# Altium PCB SBTech_IcarusBoard_1V0.PcbDoc (part 2 of 2)
Units mm, origin at the board's own origin, x right, y up, seen from the top; angles counter-clockwise.
Board outline 76.5 x 109.5 mm, 4 copper layers (Component Side, Ground Plane, Power Plane, Solder Side), stack 0.844 mm thick; 136 components, 92 nets, 463 pads, 332 vias.
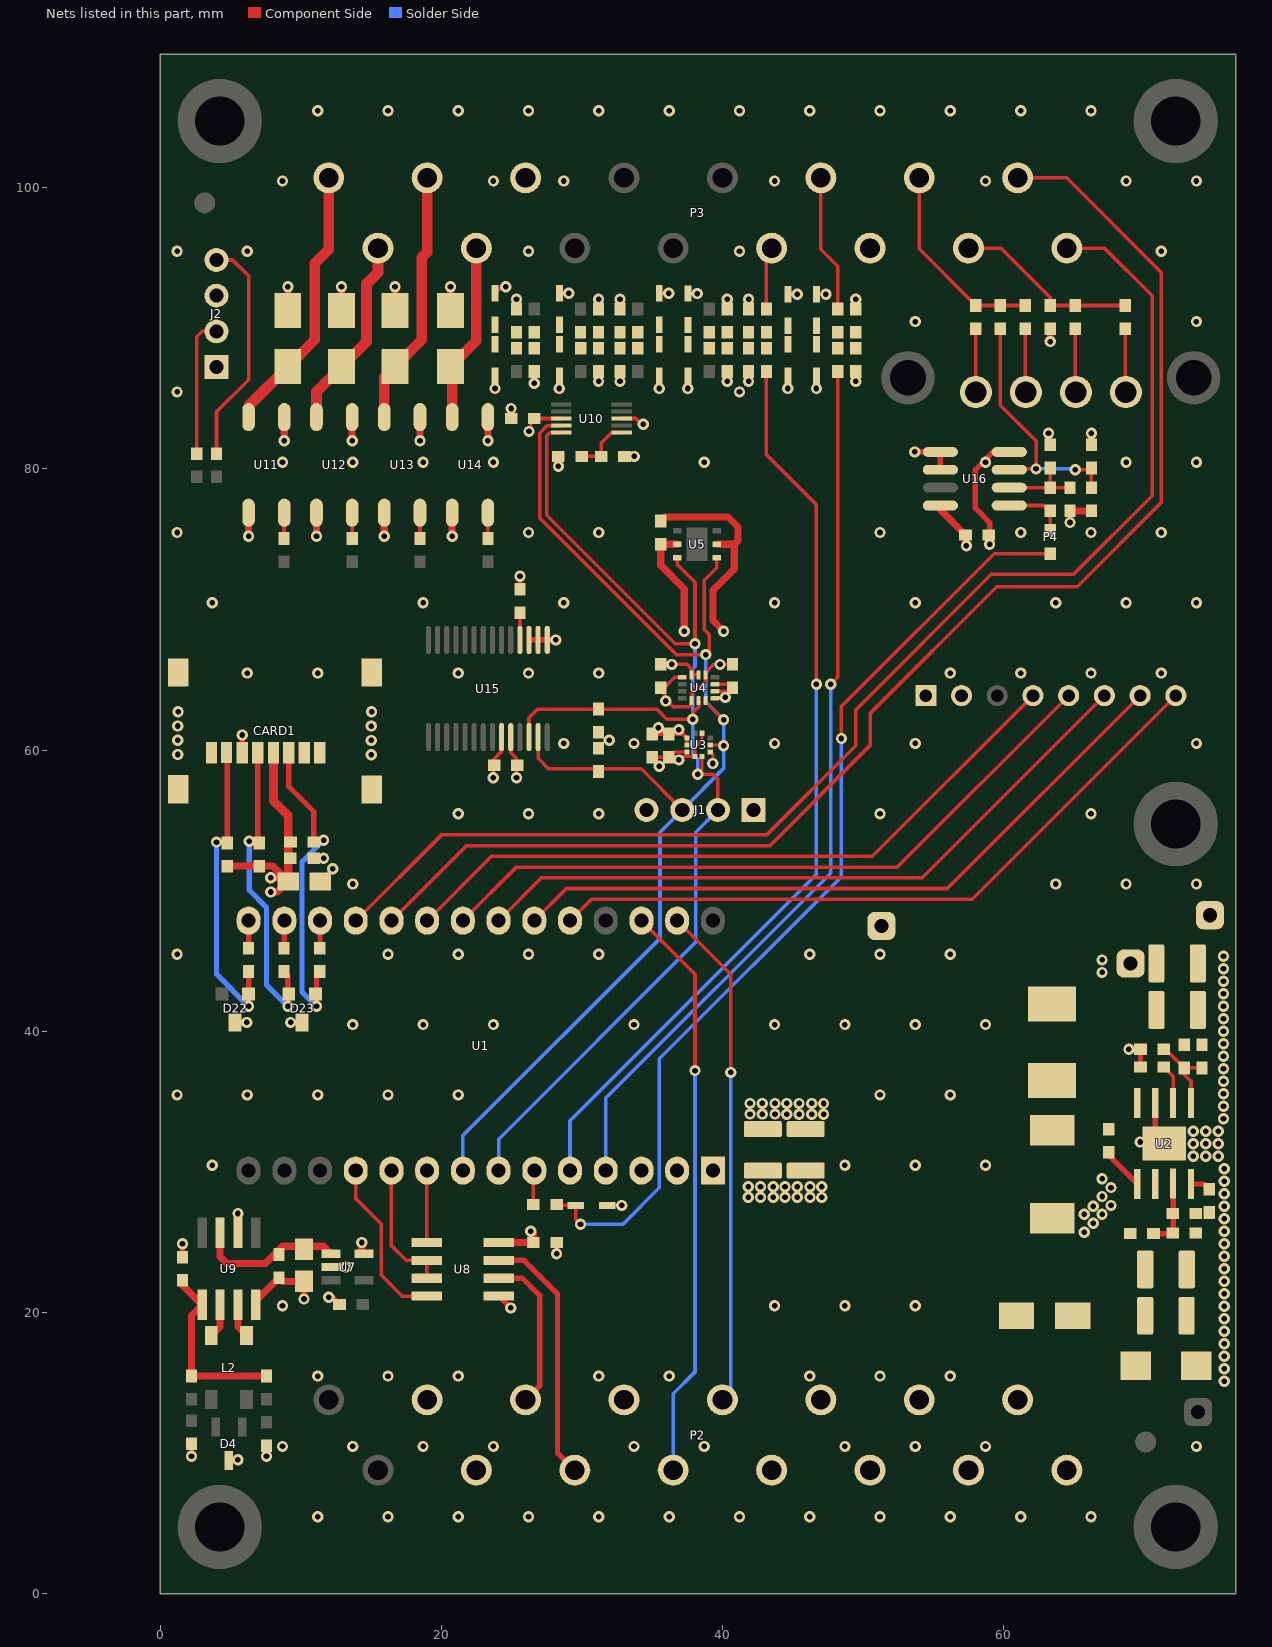
[diagram p4: the nets of this part, all layers, seen from the top]

## Via types
v1: diameter 0.8, hole 0.4, Component Side to Solder Side, tented both sides, 332 vias

## Nets (pads, with @x,y where several pads share a name; then routed paths per layer and width w, separated by ;. In a path a pad name is that pad's centre, name@x,y a point inside that pad or via, vN(x,y) a via of type N, cw(c..) or ccw(c..) an arc to the next point about the centre after c; other vN are vias at no path point) (continued)
GND: C1.2 C2.2 C4.2 C5.2 C7.2 C8.2 C10.2 C11.2 C12.2 C13.2 C14.2 C15.2 C16.2 C17.2 C18.2 C19.2 C20.2 C21.2 C22.2 C23.2 C24.2 C25.2 C26.2 C27.2 C28.2 C29.2 C30.2 C31.2 C32.2 C33.2 C34.2 CARD1.6 CARD1.9 CARD1.10 CARD1.11 CARD1.12 D2.1 D3.2 D4.3 D6.2 D8.2 D11.2 D12.2 D15.2 D16.2 D17.2 D18.2 D19.2 D20.2 D22.3 D23.3 J1.4 P2.3 P2.4 P2.7 P2.10 P2.13 P2.14 P3.5 P3.12 P4.2 pad.6@74.676,48.26 R3.1 R4.1 R5.1 R12.1 R14.2 R17.1 R22.1 R23.1 R28.1 R29.1 R42.2 R44.1 R55.2 U1.27 U2.7 U2.9 U3.3 U3.8 U3.9 U4.1 U4.2 U4.3 U4.6 U4.7 U5.2 U7.2 U8.5 U9.2 U9.8 U10.3 U11.3 U12.3 U13.3 U14.3 U15.10 U15.15 U15.16 U15.17 U16.4 U16.5 U16.6 | length 102
  Component Side w0.2: U3.9@37.476,60.374 U3.8@37.476,60.874 ; U3.3@39.132,59.874 39.32,59.686 v1(39.32,59.053)
  Component Side w0.254: v1(23.826,85.723) D6.2@23.826,86.638 ; U15.10@24.943,60.932 24.943,59.841 25.35,59.434 v1(25.35,58.037) ; C26.2@24.969,83.59 v1(24.969,84.3) ; C25.2@25.35,91.375 v1(25.35,92.073) ; v1(26.62,86.104) R12.1@26.62,86.93 ; v1(28.398,85.723) D8.2@28.398,86.638 ; v1(31.192,86.231) R17.1@31.192,86.93 ; C27.2@31.192,91.248 v1(31.192,92.073) ; v1(32.716,86.231) R22.1@32.716,86.93 ; C28.2@32.716,91.248 v1(32.716,92.073) ; U10.3@32.834,83.59 33.834,83.59 34.24,83.183 v1(34.367,83.183) ; R14.2@33.033,80.897 v1(33.732,80.897) ; v1(35.446,61.593) C16.2@35.002,61.149 37.202,61.149 U3.8@37.476,60.874 ; v1(35.51,85.723) D11.2@35.51,86.638 ; C13.2@35.612,66.102 37.478,66.102 37.804,65.776 U4.7@37.804,65.351 U4.6@38.304,65.351 ; v1(37.542,85.723) D15.2@37.542,86.638 ; U4.1@39.466,63.688 39.954,63.688 C14.2@40.454,64.188 ; U4.2@39.466,64.188 C14.2@40.454,64.188 ; U4.3@39.466,64.688 40.48,64.688 C14.2@40.717,64.451 C14.2@40.454,64.188 ; v1(40.336,86.231) R28.1@40.336,86.93 ; C30.2@40.336,91.375 v1(40.336,92.073) ; v1(41.86,86.231) R23.1@41.86,86.93 ; C29.2@41.86,91.375 v1(41.86,92.073) ; v1(44.654,85.723) D12.2@44.654,86.638 ; v1(46.686,85.723) D16.2@46.686,86.638 ; v1(49.48,86.231) R29.1@49.48,86.93 ; C31.2@49.48,91.375 v1(49.48,92.073)
  Component Side w0.381: C22.2@1.601,23.938 v1(1.601,24.89) ; v1(2.236,9.777) C23.2@2.236,10.666 ; D4.3@4.903,9.466 5.481,9.466 v1(5.538,9.523) ; D22.3@5.335,40.638 v1(6.173,40.638) ; U9.2@5.538,25.677 v1(5.538,27.049) ; CARD1.6@5.856,59.815 v1(5.856,61.082) ; v1(7.57,9.777) C24.2@7.57,10.539 ; v1(9.284,40.638) D23.3@10.097,40.638 ; C18.2@10.923,52.322 v1(11.634,52.322) ; C17.2@11.403,50.671 v1(12.292,51.56) ; v1(12,21.082) 12.255,21.082 R55.2@12.763,20.574 ; U7.2@12.16,23.241 v1(13.208,23.241) ; U8.5@24.105,21.171 v1(24.943,20.333) ; U15.17@26.243,67.842 U15.16@26.893,67.842 U15.15@27.543,67.842 v1(28.144,67.842) ; v1(28.207,24.192) C21.2@28.207,24.981 ; v1(53.671,81.214) U16.5@55.502,81.214 U16.6@55.502,79.944 ; v1(59.005,74.649) 59.005,76.198 57.989,77.214 57.989,79.945 59.258,81.214 U16.4@60.402,81.214 ; v1(68.911,38.733) R4.1@69.736,38.733 C10.2@69.736,37.463 ; U2.7@70.787,34.897 70.787,32.652 U2.9@71.417,32.022
  Component Side w0.5: U9.8@6.808,20.547 6.808,20.826 C19.2@8.459,22.477 8.713,22.223 C20.2@10.237,22.223 v1(10.237,20.966) ; R44.1@63.196,81.723 v1(63.196,82.548) ; v1(63.323,89.061) R42.2@63.323,89.978 ; C33.2@66.244,81.723 v1(66.244,82.548)
  Component Side w0.508: v1(8.84,82.008) U11.3@8.84,83.691 ; D17.2@9.094,91.279 v1(9.094,92.962) ; D18.2@12.904,91.279 v1(12.904,92.962) ; v1(13.666,82.008) U12.3@13.666,83.691 ; D19.2@16.714,91.279 v1(16.714,92.962) ; v1(18.492,82.008) U13.3@18.492,83.691 ; D20.2@20.662,91.279 v1(20.662,92.962) ; v1(23.318,82.008) U14.3@23.318,83.691 ; C12.2@35.612,76.3 35.891,76.579 40.39,76.579 41.098,75.871 41.098,74.903 40.844,74.649 ; U5.2@39.602,74.649 40.844,74.649 ; v1(40.082,68.451) 39.32,69.213 39.32,71.372 40.844,72.896 40.844,74.649
  other v1: 11.211,5.482 16.211,5.482 21.211,5.482 26.211,5.482 31.211,5.482 36.211,5.482 41.211,5.482 46.211,5.482 51.211,5.482 56.211,5.482 61.211,5.482 66.211,5.482 8.711,10.482 13.711,10.482 18.711,10.482 23.711,10.482 33.711,10.482 38.711,10.482 48.711,10.482 53.711,10.482 58.711,10.482 73.711,10.482 75.692,15.113 11.211,15.482 16.211,15.482 21.211,15.482 31.211,15.482 36.211,15.482 46.211,15.482 51.211,15.482 56.211,15.482 75.692,16.002 75.692,16.891 75.692,17.78 75.692,18.669 75.692,19.558 75.692,20.447 8.711,20.482 43.711,20.482 48.711,20.482 53.711,20.482 75.692,21.336 75.692,22.225 75.692,23.114 75.692,24.003 75.692,24.892 65.736,25.716 75.692,25.781 66.371,26.351 75.692,26.67 65.736,26.986 67.006,26.986 66.371,27.557 75.692,27.559 67.641,27.621 67.006,28.256 75.692,28.448 67.641,28.891 75.692,29.337 67.006,29.526 75.692,30.226 3.711,30.482 48.711,30.482 53.711,30.482 58.711,30.482 73.483,31.113 74.372,31.113 75.261,31.113 73.483,32.002 74.372,32.002 75.261,32.002 69.708,32.129 73.483,32.891 74.372,32.891 75.261,32.891 75.642,33.78 47.194,34.111 41.96,34.115 42.837,34.115 43.738,34.115 44.577,34.113 45.454,34.113 46.355,34.113 75.642,34.669 47.194,34.873 41.96,34.877 42.837,34.877 43.738,34.877 44.577,34.875 45.454,34.875 46.355,34.875 1.211,35.482 6.211,35.482 11.211,35.482 16.211,35.482 21.211,35.482 51.211,35.482 56.211,35.482 75.642,35.558 75.642,36.447 75.642,37.336 75.642,38.225 75.642,39.114 75.642,40.003 13.711,40.482 18.711,40.482 23.711,40.482 33.711,40.482 43.711,40.482 48.711,40.482 53.711,40.482 58.711,40.482 75.642,40.892 75.642,41.781 75.642,42.67 75.642,43.559 75.642,44.448 75.642,45.337 1.211,45.482 16.211,45.482 21.211,45.482 26.211,45.482 31.211,45.482 46.211,45.482 51.211,45.482 56.211,45.482 13.711,50.482 63.711,50.482 68.711,50.482 73.711,50.482 21.211,55.482 26.211,55.482 31.211,55.482 51.211,55.482 66.211,55.482 1.266,59.69 15.026,59.682 28.711,60.482 33.711,60.482 43.711,60.482 53.711,60.482 73.711,60.482 1.266,60.706 15.026,60.698 36.907,61.466 1.266,61.722 15.026,61.714 1.287,62.738 15.047,62.73 40.209,63.752 6.211,65.482 11.211,65.482 21.211,65.482 26.211,65.482 31.211,65.482 56.211,65.482 61.211,65.482 66.211,65.482 71.211,65.482 36.399,66.102 3.711,70.482 18.711,70.482 28.711,70.482 43.711,70.482 53.711,70.482 63.711,70.482 68.711,70.482 73.711,70.482 1.211,75.482 26.211,75.482 31.211,75.482 51.211,75.482 61.211,75.482 66.211,75.482 71.211,75.482 8.711,80.482 13.711,80.482 18.711,80.482 23.711,80.482 38.711,80.482 58.711,80.482 68.711,80.482 73.711,80.482 1.211,85.482 41.211,85.482 53.711,90.482 73.711,90.482 1.211,95.482 6.211,95.482 26.211,95.482 41.211,95.482 71.211,95.482 8.711,100.482 23.711,100.482 28.711,100.482 43.711,100.482 58.711,100.482 68.711,100.482 73.711,100.482 11.211,105.482 16.211,105.482 21.211,105.482 26.211,105.482 31.211,105.482 36.211,105.482 41.211,105.482 46.211,105.482 51.211,105.482 56.211,105.482 61.211,105.482 66.211,105.482
GPIOA: P3.16 U1.11 | length 92.3
  Component Side w0.254: U1.11@13.92,47.877 20.016,53.973 43.13,53.973 49.48,60.323 49.48,62.863 59.132,72.515 64.974,72.515 70.562,78.103 70.562,92.327 67.18,95.709 P3.16@64.5,95.709
GPIOB: P3.15 U1.10 | length 97.8
  Component Side w0.254: U1.10@16.46,47.877 21.794,53.211 43.384,53.211 50.5,60.327 50.5,62.613 59.513,71.626 65.228,71.626 71.197,77.595 71.197,93.999 64.486,100.709 P3.15@61,100.709
I2C_SCL: J1.2 R6.1 U1.22 U3.2 U4.13 U5.6 U10.10 U15.12 | length 90.2
  Component Side w0.2: v1(38.25,58.291) 38.554,58.595 U3.2@38.554,59.546
  Component Side w0.254: U15.12@26.243,60.932 26.243,62.311 26.859,62.927 R6.1@31.192,62.927 35.319,62.927 36.043,62.203 v1(37.898,62.203) 37.898,62.657 38.304,63.063 U4.13@38.304,63.526 ; U10.10@28.534,82.59 27.741,82.59 27.509,82.358 27.509,76.706 36.653,67.562 v1(38.05,67.562) 38.05,71.942 36.802,73.189 U5.6@36.802,73.699 ; v1(38.25,58.291) 39.32,58.291 39.681,57.93 J1.2@39.681,55.751 J1.2@39.574,55.644
  Solder Side w0.254: U1.22@24.08,30.097 24.08,32.335 38.1,46.355 38.1,54.17 J1.2@39.681,55.751 39.526,55.906 J1.2@39.701,56.081 ; v1(38.05,67.562) 38.05,65.937 37.898,65.784 v1(37.898,62.203) 37.898,59.714 38.25,59.361 v1(38.25,58.291)
I2C_SDA: J1.3 R7.1 U1.21 U3.4 U4.14 U5.1 U10.9 U15.13 | length 92.2
  Component Side w0.2: U4.14@38.764,63.486 v1(40.082,62.168) ; U3.4@39.132,60.374 40.031,60.374 v1(40.082,60.323)
  Component Side w0.254: U15.13@26.893,60.932 26.893,59.415 27.636,58.672 34.22,58.672 J1.3@37.141,55.751 ; U10.9@28.534,83.09 27.542,83.09 27.001,82.548 27.001,76.516 36.716,66.8 v1(38.812,66.8) 39.066,67.054 39.066,68.223 38.71,68.578 38.71,72.094 39.602,72.986 U5.1@39.602,73.699
  Solder Side w0.254: U1.21@21.54,30.097 21.54,32.589 35.56,46.609 35.56,54.17 J1.3@37.141,55.751 40.082,58.692 v1(40.082,60.323) v1(40.082,62.168) 38.812,63.438 v1(38.812,66.8)
INT_ADC0: P3.11 R25.1 | length 9.8
  Component Side w0.254: P3.11@47,100.709 47,95.63 48.21,94.419 R25.1@48.21,91.375
INT_ADC1: P3.10 R19.1 | length 4.5
  Component Side w0.254: R19.1@43.13,91.375 43.13,95.339 P3.10@43.5,95.709
NetC3_1: C3.1 U2.1 | length 3.1
  Component Side w0.381: C3.1@67.485,31.395 67.485,31.179 U2.1@69.517,29.147
NetC3_2: C3.2 D3.1 L1.1 U2.8
NetC4_1: C4.1 C5.1 D1.1 D2.2 R1.2 U2.2
NetC6_2: C6.2 R2.1 R4.2 U2.5 | length 6
  Component Side w0.254: R4.2@71.387,38.733 71.514,38.733 R2.1@72.848,37.4 ; U2.5@73.327,34.897 73.327,36.447 72.848,36.927 R2.1@72.848,37.4 ; C6.2@74.118,37.4 R2.1@72.848,37.4
NetC10_1: C10.1 U2.6 | length 2.8
  Component Side w0.254: C10.1@71.387,37.463 72.057,36.793 U2.6@72.057,34.897
NetC11_1: C11.1 R1.1 R5.2 U2.3 | length 4.6
  Component Side w0.381: R1.1@70.914,25.616 71.804,25.616 72.057,25.87 U2.3@72.057,29.172
NetC22_1: C22.1 R8.2 R9.2 U9.5 | length 13
  Component Side w0.508: C22.1@1.601,22.287 1.601,21.944 U9.5@2.998,20.547 2.236,19.785 R8.2@2.236,15.492 R9.2@7.57,15.492
NetC25_1: C25.1 D5.2 D6.1 R10.2 R11.1 R12.2
NetC27_1: C27.1 D7.2 D8.1 R15.2 R16.1 R17.2
NetC28_1: C28.1 D9.2 D11.1 R18.2 R20.1 R22.2
NetC29_1: C29.1 D10.2 D12.1 R19.2 R21.1 R23.2
NetC30_1: C30.1 D13.2 D15.1 R24.2 R26.1 R28.2
NetC31_1: C31.1 D14.2 D16.1 R25.2 R27.1 R29.2
NetC33_1: C33.1 R38.1 R39.2 U16.3 | length 18.4
  Component Side w0.254: R39.2@59.767,89.978 59.767,84.543 62.307,82.003 v1(62.307,80.008) 60.466,80.008 U16.3@60.402,79.944 ; v1(65.101,79.944) 66.116,79.944 C33.1@66.244,80.072 R38.1@66.244,78.675
  Solder Side w0.254: v1(62.307,80.008) 65.037,80.008 v1(65.101,79.944)
NetD21_2: D21.2 R40.2 R49.1 | length 68.4
  Component Side w0.254: R49.1@28.207,27.684 28.271,27.621 D21.2@29.566,27.621 29.566,26.627 v1(29.906,26.287) ; v1(48.464,60.831) 48.464,63.117 59.322,73.976 R40.2@63.196,73.976
  Solder Side w0.254: v1(29.906,26.287) 32.924,26.287 35.51,28.873 35.51,38.05 48.464,51.004 v1(48.464,60.831)
NetJ2_2: J2.2 R35.2 | length 9.9
  Component Side w0.254: R35.2@2.617,81.088 2.617,89.406 2.998,89.787 J2.2@4.014,89.787
NetJ2_4: J2.4 R36.2 | length 16.3
  Component Side w0.254: R36.2@4.014,81.088 4.014,84.072 6.3,86.358 6.3,93.724 5.157,94.867 J2.4@4.014,94.867
NetL2_3: L2.3 U9.7 | length 2.4
  Component Side w0.508: U9.7@5.538,20.547 5.538,18.981 L2.3@6.153,18.366
NetL2_4: L2.4 U9.6 | length 2.4
  Component Side w0.508: L2.4@3.653,18.366 4.268,18.981 U9.6@4.268,20.547
NetP4_10: P4.10 R46.2 | length 4.5
  Component Side w0.254: R46.2@68.657,89.978 68.657,85.505 P4.10@68.692,85.469
NetP4_11: P4.11 R45.2 | length 4.5
  Component Side w0.254: R45.2@65.101,89.978 65.101,85.505 P4.11@65.136,85.469
NetP4_12: P4.12 R43.2 | length 4.5
  Component Side w0.254: R43.2@61.545,89.978 61.545,85.505 P4.12@61.58,85.469
NetP4_13: P4.13 R41.2 | length 4.5
  Component Side w0.254: P4.13@58.024,85.469 R41.2@58.024,89.978
NetR3_2: R3.2 U2.4 | length 1.5
  Component Side w0.381: U2.4@73.327,29.147 74.243,29.147 R3.2@74.626,28.764
NetR13_2: R13.2 R14.1 U10.1 | length 4.1
  Component Side w0.254: R13.2@29.985,80.897 R14.1@31.382,80.897 31.382,81.85 32.122,82.59 U10.1@32.834,82.59
NetR30_2: R30.2 U11.2 | length 1.8
  Component Side w0.254: R30.2@8.817,75.056 8.817,76.868 U11.2@8.84,76.891
NetR31_2: R31.2 U12.2 | length 1.8
  Component Side w0.254: R31.2@13.666,75.056 U12.2@13.666,76.891
NetR32_2: R32.2 U13.2 | length 1.8
  Component Side w0.254: R32.2@18.492,75.056 U13.2@18.492,76.891
NetR33_2: R33.2 U14.2 | length 1.8
  Component Side w0.254: R33.2@23.318,75.056 U14.2@23.318,76.891
NetR34_1: R34.1 U15.18 | length 1.9
  Component Side w0.254: U15.18@25.593,67.842 25.604,67.853 R34.1@25.604,69.785
NetR37_2: R37.2 R44.2 R47.2 U16.2 | length 5.7
  Component Side w0.254: U16.2@60.402,78.674 R37.2@64.72,78.675 ; R47.2@63.323,78.675 R44.2@63.323,80.072
NetR40_1: R40.1 R47.1 U16.1 | length 4.3
  Component Side w0.254: U16.1@60.402,77.404 62.815,77.404 R47.1@63.196,77.024 ; R40.1@63.323,75.627 R47.1@63.323,77.024
OPTO_OUT0: D20.1 P3.4 U14.4 | length 12.8
  Component Side w0.762: U14.4@20.778,83.691 20.778,87.164 D20.1@20.662,87.279 22.5,89.117 P3.4@22.5,95.709
OPTO_OUT1: D19.1 P3.3 U13.4 | length 18.3
  Component Side w0.762: U13.4@15.952,83.691 15.952,86.517 D19.1@16.714,87.279 18.619,89.184 18.619,95.037 19,95.418 P3.3@19,100.709
OPTO_OUT2: D18.1 P3.2 U12.4 | length 13.8
  Component Side w0.762: U12.4@11.126,83.691 11.126,85.501 D18.1@12.904,87.279 14.682,89.057 14.682,93.155 15.5,93.973 P3.2@15.5,95.709
OPTO_OUT3: D17.1 P3.1 U11.4 | length 19.4
  Component Side w0.762: U11.4@6.3,83.691 6.3,84.485 D17.1@9.094,87.279 10.999,89.184 10.999,94.613 12,95.614 P3.1@12,100.709
RS485_A: P2.12 U8.6 | length 11.2
  Component Side w0.381: U8.6@24.105,22.441 25.782,22.441 27.001,21.222 27.001,14.792 P2.12@26,13.791
RS485_B: P2.11 U8.7 | length 18.2
  Component Side w0.381: U8.7@24.105,23.711 25.894,23.711 28.271,21.334 28.271,10.02 P2.11@29.5,8.791
RS485_EN: U1.19 U8.2 U8.3 | length 9.6
  Component Side w0.254: U1.19@16.46,30.097 16.46,24.763 17.512,23.711 U8.2@18.975,23.711 U8.3@18.975,22.441
RTD_1: P3.13 R39.1 R41.1 R43.1 | length 14.3
  Component Side w0.254: P3.13@54,100.709 54,95.653 R41.1@58.024,91.629 R39.1@59.767,91.629 R43.1@61.545,91.629
RTD_2: P3.14 R42.1 R45.1 R46.1 | length 13.2
  Component Side w0.254: P3.14@57.5,95.709 59.814,95.709 63.323,92.2 R42.1@63.323,91.629 R45.1@65.101,91.629 R46.1@68.657,91.629
RTD_CLK: P4.4 U1.9 | length 49.7
  Component Side w0.254: U1.9@19,47.877 23.572,52.449 50.658,52.449 P4.4@62.088,63.879
RTD_CS: P4.7 U1.6 | length 49.7
  Component Side w0.254: U1.6@26.62,47.877 28.906,50.163 55.992,50.163 P4.7@69.708,63.879
RTD_MISO: P4.5 U1.8 | length 49.7
  Component Side w0.254: U1.8@21.54,47.877 25.35,51.687 52.436,51.687 P4.5@64.628,63.879
RTD_MOSI: P4.6 U1.7 | length 49.7
  Component Side w0.254: U1.7@24.08,47.877 27.128,50.925 54.214,50.925 P4.6@67.168,63.879
RTD_RDY: P4.8 U1.5 | length 49.7
  Component Side w0.254: U1.5@29.16,47.877 30.684,49.401 57.77,49.401 P4.8@72.248,63.879
SD_CLK: R53.1 U1.13 | length 2
  Component Side w0.381: R53.1@8.817,45.909 8.84,45.932 U1.13@8.84,47.877
SD_CMD: R54.1 U1.12 | length 2
  Component Side w0.381: R54.1@11.36,45.909 11.38,45.928 U1.12@11.38,47.877
SD_DAT0: R52.1 U1.14 | length 2
  Component Side w0.381: R52.1@6.3,45.909 U1.14@6.3,47.877
sdClk: CARD1.5 D23.2 R50.2 R53.2 | length 22.5
  Component Side w0.381: v1(6.343,53.529) 7.062,53.529 6.959,53.632 CARD1.5@6.959,59.815 ; R53.2@8.817,44.258 9.094,43.981 v1(9.094,41.781)
  Solder Side w0.381: v1(6.343,53.529) 6.343,50.043 7.57,48.816 7.57,43.305 v1(9.094,41.781)
sdCmd: CARD1.3 D23.1 R48.2 R54.2 | length 23.3
  Component Side w0.381: CARD1.3@9.16,59.815 9.16,57.4 10.935,55.624 R48.2@10.935,53.465 11.062,53.592 v1(11.634,53.592) ; v1(11.126,41.781) 11.126,44.023 R54.2@11.36,44.258
  Solder Side w0.381: v1(11.126,41.781) 10.097,42.81 10.097,52.056 v1(11.634,53.592)
sdDat0: CARD1.7 D22.1 R51.2 R52.2 | length 22.3
  Component Side w0.381: v1(4.014,53.465) 4.712,53.465 R51.2@4.776,53.402 4.776,59.782 CARD1.7@4.735,59.823 ; v1(6.3,41.781) D22.1@6.3,42.67 R52.2@6.3,44.258
  Solder Side w0.381: v1(4.014,53.465) 4.014,44.067 v1(6.3,41.781)
sdDat1: CARD1.8
sdDat2: CARD1.1
sdDat3: CARD1.2
SER_RX: U1.20 U8.1 | length 5.1
  Component Side w0.254: U8.1@18.975,24.981 18.975,30.072 U1.20@19,30.097
SER_TX: U1.18 U8.4 | length 12
  Component Side w0.254: U1.18@13.92,30.097 13.92,28.111 15.748,26.283 15.748,22.645 17.222,21.171 U8.4@18.975,21.171
UART0_RX: P2.8 U1.2 | length 35.9
  Component Side w0.254: U1.2@36.78,47.877 40.59,44.067 v1(40.59,37.082)
  Solder Side w0.254: P2.8@40,13.791 40.59,14.381 v1(40.59,37.082)
UART0_TX: P2.9 U1.3 | length 41.3
  Component Side w0.254: U1.3@34.24,47.877 38.05,44.067 v1(38.05,37.209)
  Solder Side w0.254: P2.9@36.5,8.791 36.5,14.224 38.05,15.774 v1(38.05,37.209)
V3.3: C12.1 C13.1 C14.1 C15.1 C16.1 C17.1 C18.1 C21.1 C26.1 C32.1 CARD1.4 D5.1 D7.1 D9.1 D10.1 D13.1 D14.1 D21.1 J1.1 J2.1 J2.3 P2.6 pad.6@51.308,47.498 R6.2 R7.2 R13.1 R34.2 R48.1 R50.1 R51.1 U1.26 U3.1 U3.6 U3.10 U4.5 U4.8 U4.12 U5.5 U8.8 U10.8 U11.1 U12.1 U13.1 U14.1 U15.9 | length 65.7
  Component Side w0.2: U3.10@37.476,59.874 36.559,59.874 36.231,59.546 U3.1@38.054,59.546 38.054,60.2 38.554,60.7 U3.6@38.554,61.202
  Component Side w0.254: v1(23.699,58.037) 23.699,59.307 24.293,59.901 U15.9@24.293,60.932 ; D5.1@23.826,92.492 24.296,92.962 v1(24.588,92.962) ; R34.2@25.604,71.436 v1(25.604,72.377) ; v1(26.243,82.675) 26.366,82.675 26.366,83.336 C26.1@26.62,83.59 U10.8@28.534,83.59 ; D7.1@28.398,92.492 v1(29.071,92.492) ; D21.1@31.802,27.621 v1(32.843,27.621) ; v1(35.51,58.863) 35.573,58.926 C16.1@35.002,59.498 C15.1@36.183,59.498 C15.1@36.231,59.546 ; D9.1@35.51,92.492 v1(36.183,92.492) ; U4.8@37.141,65.188 36.614,65.188 35.637,64.211 35.97,63.878 v1(35.97,63.498) 36.081,63.498 36.502,63.078 37.63,63.078 37.804,63.252 U4.12@37.804,63.526 37.804,64.141 38.05,64.387 38.304,64.387 38.804,64.887 U4.5@38.804,65.351 38.804,65.522 39.383,66.102 C14.1@40.717,66.102 ; D13.1@37.542,92.474 v1(38.215,92.474) ; D10.1@44.654,92.429 v1(45.327,92.429) ; D14.1@46.686,92.429 v1(47.359,92.429)
  Component Side w0.381: v1(28.334,80.199) R13.1@28.334,80.897
  Component Side w0.508: R51.1@4.776,51.751 R50.1@7.062,51.751 8.038,51.751 C17.1@9.117,50.671 ; v1(6.3,75.208) U11.1@6.3,76.891 ; v1(7.874,49.911) 8.357,49.911 C17.1@9.117,50.671 ; v1(7.874,50.927) 8.862,50.927 C17.1@9.117,50.671 ; v1(11.126,75.208) U12.1@11.126,76.891 ; v1(15.952,75.208) U13.1@15.952,76.891 ; v1(20.778,75.208) U14.1@20.778,76.891 ; U8.8@24.105,24.981 C21.1@26.556,24.981 26.556,25.589 v1(26.366,25.779) ; U5.5@36.802,74.649 C12.1@35.612,74.649 35.612,73.15 37.288,71.473 v1(37.288,68.451)
  Component Side w0.635: CARD1.4@8.062,59.815 8.062,56.402 9.117,55.347 C17.1@9.117,50.671
  other v1: 36.907,59.307 31.954,60.704 39.828,66.102
V5: C1.1 C2.1 C6.1 C7.1 C8.1 C34.1 L1.2 P2.5 P4.1 pad.6@69.038,44.829 R2.2 R37.1 R38.2 U1.28 U7.5 U16.8 | length 6.8
  Component Side w0.508: v1(14.351,24.981) 14.351,24.35 U7.5@14.51,24.191 ; U16.8@55.502,77.404 55.502,77.098 C34.1@57.29,75.309 57.29,74.611 v1(57.354,74.547) ; v1(64.72,76.198) R37.1@64.72,77.024 R38.2@66.244,77.024
  other v1: 44.45,28.194 45.327,28.194 46.228,28.194 47.067,28.192 41.833,28.196 42.71,28.196 43.611,28.196 44.45,28.956 45.327,28.956 46.228,28.956 47.067,28.954 41.833,28.958 42.71,28.958 43.611,28.958 67.006,44.194 67.006,45.083
V5Can: C19.1 C20.1 U7.1 U9.3 | length 10.5
  Component Side w0.508: U9.3@4.268,25.677 4.268,23.965 4.74,23.493 7.479,23.493 8.702,24.716 11.635,24.716 U7.1@12.16,24.191
VExt: D1.2 P2.1 P2.2
WALT_ADC0: R27.2 U1.25 | length 63.7
  Component Side w0.254: v1(47.702,64.688) 48.21,65.196 R27.2@48.21,86.93
  Solder Side w0.254: U1.25@31.7,30.097 31.7,35.256 47.702,51.258 v1(47.702,64.688)
WALT_ADC1: R21.2 U1.24 | length 65.6
  Component Side w0.254: R21.2@43.13,86.93 43.13,81.024 46.686,77.468 v1(46.686,64.688)
  Solder Side w0.254: U1.24@29.16,30.097 29.16,33.653 46.686,51.179 v1(46.686,64.688)
WALT_ADC2: R49.2 U1.23 | length 2.4
  Component Side w0.254: R49.2@26.556,27.684 26.556,30.034 U1.23@26.62,30.097
pads on no net: ?.1 CARD1.C D4.9 D22.2 D22.10 D23.10 P4.3 P4.9 P4.14 U1.1 U1.4 U3.5 U3.7 U4.4 U4.9 U4.10 U4.11 U5.3 U5.4 U5.7 U7.3 U10.2 U15.3 U15.4 U15.5 U15.6 U15.7 U15.8 U15.11 U15.14 U15.19 U15.20 U15.25 U15.26 U15.27 U15.28 U16.7

## Polygon pours and split planes (outlines as drawn)
GND on Solder Side "BOT_GND" (solid, remove dead copper, pour order 6): 0,0 76.5,0 76.5,109.5 0,109.5
GND on Component Side "TOP_GND" (solid, remove dead copper, pour order 4): 0,0 76.5,0 76.5,109.5 0,109.5
GND on Ground Plane (split plane): 75.99,0.51 0.51,0.51 0.51,108.99 75.99,108.99
V3.3 on Power Plane (split plane): 50.349,90.299 50.354,90.26 50.369,90.224 50.393,90.192 51.488,89.098 51.488,73.695 49.754,71.961 49.73,71.93 49.715,71.894 49.71,71.854 49.71,52.753 49.715,52.714 49.73,52.678 49.754,52.646 52.681,49.72 52.681,45.577 49.754,42.65 48.274,41.171 40.796,41.171 40.757,41.165 40.721,41.15 40.689,41.126 36.673,37.11 36.649,37.079 36.634,37.042 36.629,37.003 36.629,27.43 36.634,27.391 36.649,27.355 36.673,27.323 39.086,24.91 39.117,24.886 39.154,24.871 39.193,24.866 45.734,24.866 49.456,21.145 49.456,12.743 45.655,8.942 37.026,8.942 22.114,23.854 18.857,27.112 18.825,27.136 18.789,27.151 18.75,27.156 3.613,27.156 0.51,30.259 0.51,93.767 2.302,95.558 50.349,95.558
V5 on Power Plane (split plane): 75.99,33.781 73.483,33.779 73.483,30.225 75.99,30.226 75.99,0.51 0.51,0.51 0.51,29.831 3.444,26.898 3.475,26.874 3.511,26.859 3.551,26.853 18.687,26.853 21.9,23.64 36.857,8.684 36.888,8.66 36.925,8.645 36.964,8.639 45.717,8.639 45.757,8.645 45.778,8.653 45.793,8.66 45.824,8.684 49.714,12.573 49.738,12.605 49.753,12.641 49.758,12.68 49.758,21.207 49.753,21.246 49.738,21.283 49.714,21.314 45.904,25.124 45.873,25.148 45.836,25.163 45.797,25.169 39.256,25.169 36.931,27.493 36.931,36.94 40.859,40.868 48.337,40.868 48.376,40.873 48.413,40.888 48.444,40.912 49.968,42.436 52.939,45.407 52.963,45.439 52.969,45.454 52.978,45.475 52.983,45.514 52.983,49.782 52.978,49.821 52.963,49.858 52.939,49.889 50.012,52.816 50.012,71.792 51.746,73.525 51.77,73.557 51.785,73.593 51.79,73.632 51.79,89.16 51.785,89.199 51.77,89.236 51.746,89.267 50.651,90.362 50.651,95.709 50.646,95.748 50.631,95.785 50.607,95.816 50.576,95.84 50.539,95.855 50.5,95.861 2.239,95.861 2.2,95.855 2.163,95.84 2.132,95.816 0.51,94.195 0.51,108.99 75.99,108.99

## Keep-outs
Component Side:
  lines w0.15: 0,48.987 0.077,48.987
Edge.Cuts:
  region: 36.491,69.864 34.494,71.883 34.494,77.341 41.987,77.341 41.987,71.838 40.014,69.843
  lines w0.15: 0,0 76.5,0 76.5,109.5 0,109.5 0,0

## Other copper
Component Side:
  rectangle net V3.3: 31.192,60.069 32.208,61.276
  rectangle net V5: 38.431,27.684 47.448,31.113
  rectangle net GND: 0.508,56.134 2.032,66.548
  rectangle net GND: 14.235,56.134 15.952,66.548
  region net NetC28_1: 32.716,88.682 35.218,88.682 35.51,88.975 35.51,90.295 34.456,90.295 33.986,89.825 32.716,89.825
  region net NetC29_1: 41.86,88.581 44.362,88.581 44.654,88.873 44.654,90.194 43.6,90.194 43.13,89.724 41.86,89.724
  region net NetC25_1: 23.826,88.873 24.118,88.581 26.62,88.581 26.62,89.724 24.296,89.724 23.826,90.194
  region net NetC27_1: 28.398,88.873 28.69,88.581 31.192,88.581 31.192,89.724 28.868,89.724 28.398,90.194
  region net NetC30_1: 37.542,88.873 37.834,88.581 40.336,88.581 40.336,89.724 38.012,89.724 37.542,90.194
  region net NetC31_1: 46.686,88.873 46.978,88.581 49.48,88.581 49.48,89.724 47.156,89.724 46.686,90.194
  region net VExt: 58.848,11.585 63.45,6.983 65.99,6.983 67.168,8.162 67.168,11.901 62.434,16.635 62.434,20.699 61.926,21.207 59.452,21.207 58.848,20.603
  region net NetC4_1: 71.07,14.686 66.415,14.686 63.421,17.68 63.421,21.941 68.911,27.43 69.673,27.43 70.308,28.065 70.308,29.081 70.562,29.335 71.07,29.335 71.324,29.081 71.324,27.507 69.978,26.161 69.978,24.91 71.07,23.818
  region net V5: 61.418,40.003 71.426,40.003 72.696,38.733 74.556,38.733 74.556,39.495 73.356,39.495 72.057,40.794 72.057,46.607 63.196,46.607 61.418,44.829
  region net NetC3_2: 61.672,38.479 67.006,38.479 69.517,35.968 69.517,33.879 68.022,32.383 61.672,32.383
  region net GND: 71.832,14.73 71.832,24.001 73.263,25.433 73.263,27.521 75.678,27.521 76.15,27.049 76.15,14.73
  region net GND: 73.327,40.13 74.499,40.13 75.007,39.622 75.007,34.462 73.691,33.145 69.927,33.145 69.927,30.859 74.245,30.859 75.261,29.843 75.261,27.811 73.229,25.779 73.229,24.636 76.15,24.636 76.15,45.718 75.388,46.48 73.229,46.48 73.229,40.229
  region net GND: 65.29,27.811 66.687,29.208 66.625,29.27 66.625,29.97 67.768,29.97 68.022,29.716 68.022,26.922 65.863,24.763 61.672,24.763 61.672,27.811
  region net GND: 47.575,32.284 38.839,32.284 37.923,31.367 37.923,28.827 35.637,28.827 35.637,32.284 38.659,35.306 47.575,35.306
  pour cut-out: 59.957,43.178 66.942,43.178 66.942,35.304 59.957,35.304
  pour cut-out: 60.213,34.415 66.687,34.415 66.687,25.651 60.213,25.651
  pour cut-out: 47.575,35.306 47.575,27.811 47.448,27.684 38.431,27.684 38.431,35.078 38.659,35.306
  pour cut-out: 70.485,46.609 75.259,46.609 76.15,45.718 76.073,45.641 76.073,40.386 69.088,40.386 68.834,40.64
  text "TOP" at 2.998,33.134 h1.2
Solder Side:
  text "BOT" at 5.853,33.147 h1.2
Ground Plane (plane layer: these items are gaps in the copper):
  pour cut-out: 41.833,28.958 41.836,28.954 47.067,28.954 47.067,28.192 47.064,28.196 41.833,28.196
Power Plane (plane layer: these items are gaps in the copper):
  pour cut-out: 73.483,33.779 76.5,33.781 76.5,30.226 73.483,30.225
  pour cut-out: 41.96,34.877 41.963,34.873 47.194,34.873 47.194,34.111 47.191,34.115 41.96,34.115
  pour cut-out: 67.006,29.526 67.006,28.256 65.736,26.986 65.736,25.716 67.641,27.621 67.641,28.891
  lines w0.3: 45.797,25.017 49.607,21.207 ; 45.797,25.017 49.607,21.207 ; 45.797,25.017 39.193,25.017 36.78,27.43 36.78,37.003 40.796,41.019 48.337,41.019 ; 48.337,41.019 49.861,42.543 ; 48.337,41.019 49.861,42.543 ; 49.607,21.207 49.607,12.68 45.717,8.791 43.5,8.791 36.964,8.791 22.007,23.747 18.75,27.005 3.551,27.005 0,30.555 0,88.39 0,93.47 2.239,95.709 50.5,95.709 50.5,90.299 51.639,89.16 51.639,73.632 49.861,71.854 49.861,52.753 52.832,49.782 52.832,45.514 49.861,42.543

## Silkscreen, mask and mechanical layers (free items; w line width, h text height)
Top Overlay:
  lines w0.254: 10.198,4.091 10.198,0.673 66.198,0.673 66.198,4.091 ; 10.302,105.409 10.302,108.827 66.302,108.827 66.302,105.409 ; 17.198,0.673 17.198,4.091 ; 20.698,0.673 20.698,4.091 ; 24.198,0.673 24.198,4.091 ; 24.302,105.409 24.302,108.827 ; 27.802,105.409 27.802,108.827 ; 31.198,0.673 31.198,4.091 ; 34.698,0.673 34.698,4.091 ; 41.698,0.673 41.698,4.091 ; 41.802,105.409 41.802,108.827 ; 45.198,0.673 45.198,4.091 ; 48.698,0.673 48.698,4.091 ; 48.802,105.409 48.802,108.827 ; 52.198,0.673 52.198,4.091 ; 52.302,105.409 52.302,108.827 ; 59.198,0.673 59.198,4.091 ; 59.302,105.409 59.302,108.827
  text "OUTPUT" at 24.302,108.827 h2 r180
  text "GND" at 27.749,108.827 h1.2 r180
  text "Ext Analog" at 41.802,108.827 h2 r180
  text "Int An" at 48.802,108.827 h2 r180
  text "GND" at 52.249,108.827 h1.2 r180
  text "RTD" at 59.302,108.827 h2 r180
  text "GPIO" at 66.302,108.827 h2 r180
  text "3" at 13.802,106.934 h1.5 r180
  text "2" at 17.302,106.934 h1.5 r180
  text "1" at 20.802,106.934 h1.5 r180
  text "0" at 24.302,106.934 h1.5 r180
  text "3" at 31.302,106.934 h1.5 r180
  text "2" at 34.803,106.934 h1.5 r180
  text "1" at 38.302,106.934 h1.5 r180
  text "0" at 41.803,106.934 h1.5 r180
  text "1" at 45.302,106.934 h1.5 r180
  text "0" at 48.803,106.934 h1.5 r180
  text "1" at 55.803,106.934 h1.5 r180
  text "2" at 59.303,106.934 h1.5 r180
  text "B" at 62.803,106.934 h1.5 r180
  text "A" at 66.303,106.934 h1.5 r180
  text "GND" at 73.533,49.403 h1.2
  text "3.3V" at 52.705,47.117 h1.2
  text "+5V" at 68.134,46.028 h1.2
  text "SB Tech AS - Icarus Board v1.0" at 30.684,17.905 h2
  text "H    L" at 10.198,2.54 h1.5
  text "A    B" at 24.198,2.54 h1.5
  text "Tx    Rx" at 34.698,2.54 h1.5
  text "POWER / IN" at 60.198,1.27 h1.5
  text "CAN" at 10.198,0.889 h2
  text "RS485" at 24.198,0.889 h2
  text "UART" at 34.671,0.868 h2
  text "GND" at 52.198,0.889 h2
  text "GND" at 17.198,0.673 h1.2
  text "GND" at 20.698,0.673 h1.2
  text "GND" at 31.198,0.673 h1.2
  text "GND" at 41.698,0.673 h1.2
  text "3.3V" at 45.198,0.673 h1.2
  text "5V" at 48.698,0.673 h1.2
Top Solder:
  drawing of 3 lines, arcs and shapes, not listed
Drill Guide:
  lines w0.15: 35.079,77.343 ccw(c35.079,76.867) 34.742,77.204 ccw(c35.079,76.867) 34.602,76.867 34.602,76.598 34.602,72.843 ccw(c35.102,72.843) 34.749,72.49 36.533,70.705 cw(c36.196,70.369) 36.673,70.369 36.673,70.318 cw(c36.351,70.318) 36.579,70.091 36.476,69.989 cw(c36.163,70.302) 36.163,69.859 cw(c36.163,70.236) 35.896,69.969 35.872,69.994 ; 35.095,77.327 35.119,77.327 ; 35.102,77.343 41.542,77.343 cw(c41.542,76.876) 41.872,77.207 41.957,77.121 cw(c41.73,76.894) 42.051,76.894 42.051,72.843 cw(c41.575,72.843) 41.912,72.507 40.111,70.705 ccw(c40.447,70.369) 39.971,70.369 ccw(c40.415,70.369) 40.101,70.055 40.208,69.948 ccw(c40.369,70.109) 40.369,69.881 ccw(c40.369,70.705) 40.952,70.122 42.607,71.778 ccw(c41.572,72.813) 43.036,72.813 43.036,76.874 ccw(c41.572,76.874) 42.607,77.909 ccw(c41.542,76.843) 41.542,78.351 35.102,78.351 ccw(c35.102,76.861) 34.049,77.915 34.002,77.868 ccw(c34.951,76.919) 33.609,76.919 33.609,72.696 ccw(c34.673,72.696) 33.921,71.944 35.968,69.898
  lines w0.2: 0,0 76.5,0 76.5,109.5 0,109.5 0,0
Mechanical 14:
  lines w0.254: 8.698,4.091 8.698,16.091 66.198,16.091 66.198,4.091 8.698,4.091 ; 11.702,94.669 69.202,94.669 69.202,106.669 11.702,106.669 11.702,94.669
Mechanical 30:
  drawing of 1297 lines, arcs and shapes, not listed
Mechanical 32:
  lines w0.15: 35.095,77.327 ccw(c35.095,76.85) 34.758,77.187 ccw(c35.095,76.85) 34.619,76.85 34.619,76.581 34.619,72.827 ccw(c35.119,72.827) 34.765,72.473 36.55,70.689 cw(c36.213,70.352) 36.689,70.352 36.689,70.301 cw(c36.368,70.301) 36.595,70.074 36.493,69.972 cw(c36.18,70.286) 36.18,69.842 cw(c36.18,70.219) 35.913,69.953 35.888,69.977 ; 35.119,77.327 41.558,77.327 cw(c41.558,76.86) 41.889,77.19 41.974,77.105 cw(c41.747,76.877) 42.068,76.877 42.068,72.827 cw(c41.592,72.827) 41.929,72.49 40.127,70.689 ccw(c40.464,70.352) 39.988,70.352 ccw(c40.431,70.352) 40.118,70.038 40.225,69.931 ccw(c40.386,70.092) 40.386,69.864 ccw(c40.386,70.688) 40.969,70.106 42.624,71.761 ccw(c41.588,72.797) 43.053,72.797 43.053,76.857 ccw(c41.588,76.857) 42.624,77.893 ccw(c41.558,76.827) 41.558,78.334 35.119,78.334 ccw(c35.119,76.845) 34.066,77.898 34.019,77.851 ccw(c34.968,76.902) 33.626,76.902 33.626,72.68 ccw(c34.69,72.68) 33.938,71.928 35.984,69.881
  lines w0.254: 0,0 76.5,0 76.5,109.5 0,109.5 0,0

## Text inside footprints (layer, text, board x,y; h text height)
CARD1: Top Overlay "LOCK" at 3.087,64.671 h1 r90; Top Overlay "OPEN" at 13.247,67.465 h1 r270
U1: Mechanical 13 "Antenna Area" at -0.177,34.415 h1.52 r90